# Altium PCB Mixed Signal Board Project.PcbDoc (part 2 of 2)
Units mm, origin at the board's own origin, x right, y up, seen from the top; angles counter-clockwise.
Board outline 70.1 x 70.99 mm, 4 copper layers (Top Layer, GND, VCC, Bottom Layer), stack 1.565 mm thick; 188 components, 144 nets, 738 pads, 167 vias.
Unrouted connection lines stored in the file: 495.
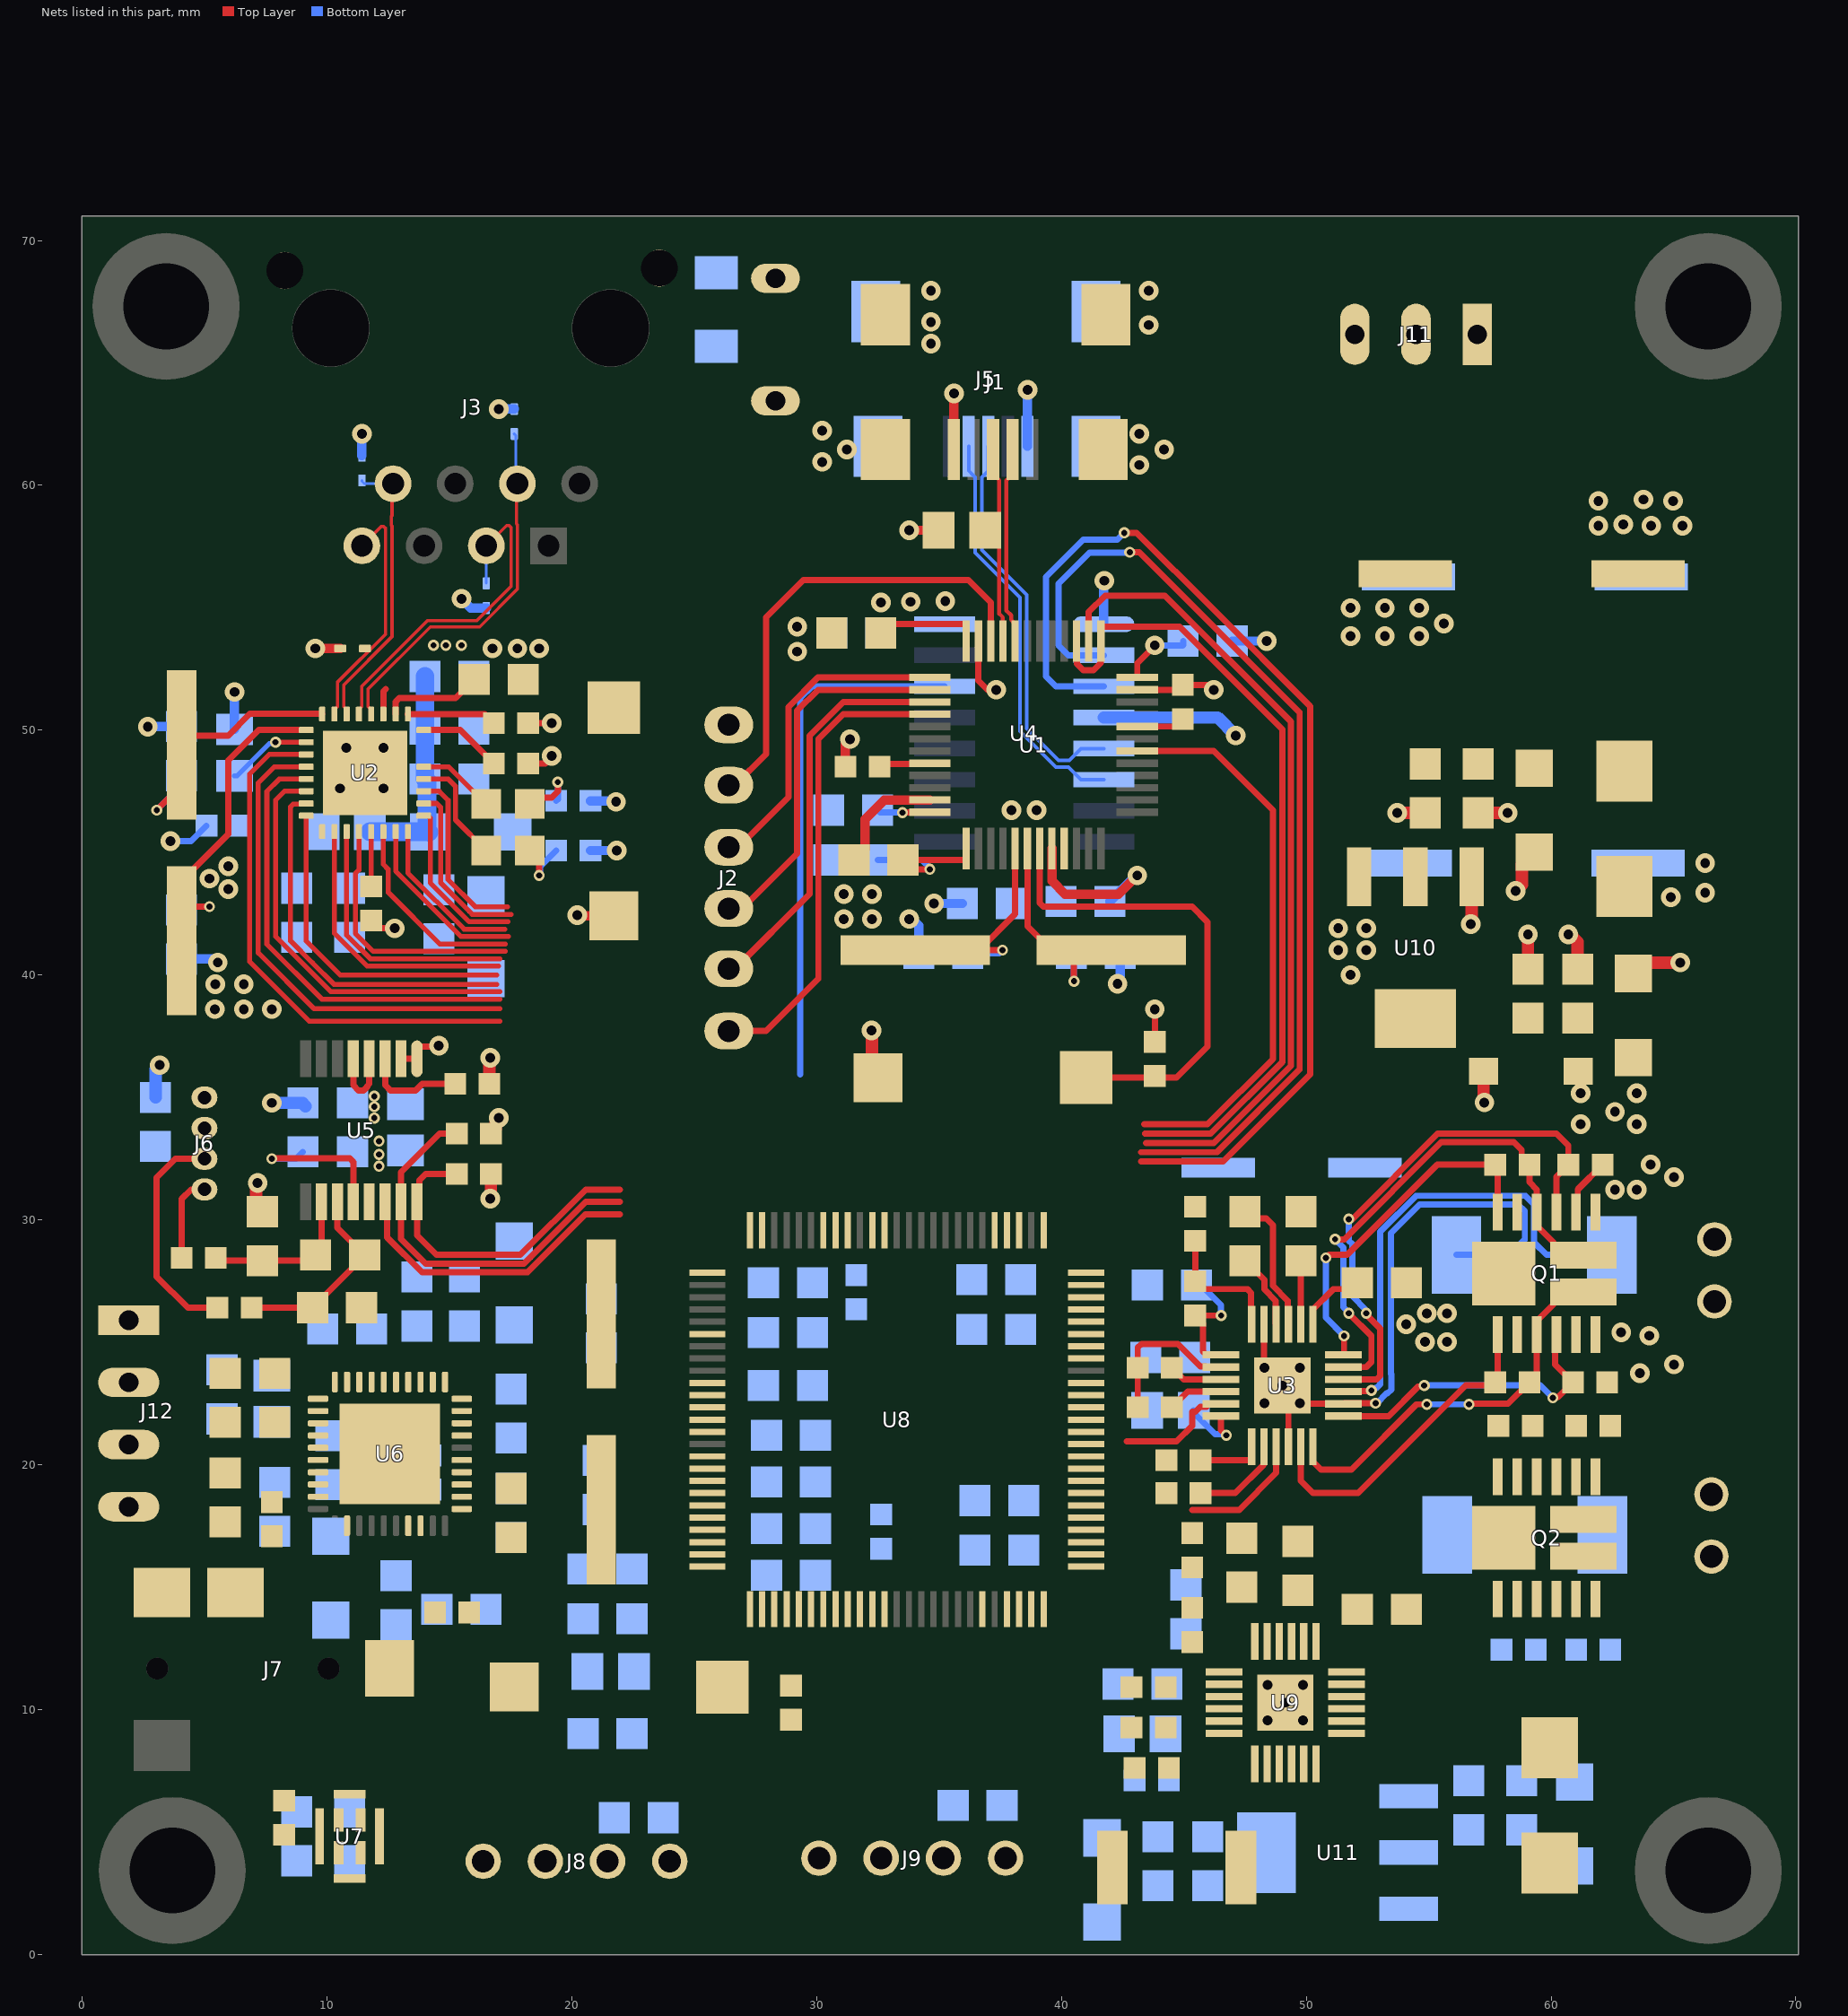
[diagram p4: the nets of this part, all layers, seen from the top]

## Part data (continued)
U8: library part IC_STM32F407VGT6, "ARM® Cortex®-M4 STM32F4 Microcontroller IC 32-Bit 168MHz 1MB (1M x 8) FLASH 100-LQFP (14x14)", Alternate Part Number-1=STM32F407VET6, Case/Package=LQFP100, Manufacturer=STMicroelectronics, Manufacturer Part Number=STM32F407VGT6, Supplier Part Number-1=STM32F407VGT6, Supplier-1=ARROW
U10: library part REG_15V-3.3V-0.9A-12W-SOT223, "Linear Voltage Regulator IC 1 Output 800mA SOT-223", Alternate Part Number-1=NA, Case/Package=SOT223, Manufacturer=STMicroelectronics, Manufacturer Part Number=LD1117S33CTR, Supplier Part Number-1=LD1117S33CTR, Supplier-1="SP ROAD"
U11: library part REG_15V-1.8V-0.8A-1.4W-SOT223, "LDO Voltage Regulators 1.8V 0.8A Positive", Alternate Part Number-1=NA, Case/Package=SOT-223-3, Manufacturer=STMicroelectronics, Supplier Part Number-1=511-LD1117S18-TR, Manufacturer Part Number=LD1117S18TR, Supplier-1=Mouser
X1 X2: library part XTAL_8MHZ-ECS-80-32-5PX-SMD, "8MHz ±30ppm Crystal 32pF 60 Ohms HC-49/US", Alternate Part Number-1=NA, Case/Package=SMD/SMT, Manufacturer="Fox Electronics", Manufacturer Part Number=ECS-80-32-5PX-TR, Supplier Part Number-1=ECS-80-32-5PX-TR, Supplier-1="SP ROAD"
Y1: library part XTAL_25Mhz-FOXSDLF/250F-20, "25MHz ±30ppm Crystal 20pF 30 Ohms HC-49/US", Alternate Part Number-1=NA, Case/Package=SMD, Manufacturer=Abracon, Manufacturer Part Number=FOXSDLF/250F-20, Supplier Part Number-1=FOXSDLF/250F-20, Supplier-1=MOUSER

## Via types
v1: diameter 0.8, hole 0.4, Top Layer to Bottom Layer, 132 vias
v2: diameter 0.45, hole 0.25, Top Layer to Bottom Layer, 35 vias

## Nets (pads, with @x,y where several pads share a name; then routed paths per layer and width w, separated by ;. In a path a pad name is that pad's centre, name@x,y a point inside that pad or via, vN(x,y) a via of type N, cw(c..) or ccw(c..) an arc to the next point about the centre after c; other vN are vias at no path point)
+1V8: C37.2 C38.2 C87.2 C88.2 C89.2 D8.K FB3.1 U6.34 U11.2 U11.4
+3V3: C1.2 C2.2 C3.2 C4.2 C7.2 C8.2 C9.2 C16.2 C17.2 C18.2 C19.2 C28.2 C29.2 C31.2 C44.2 C45.2 C46.2 C47.2 C52.2 C53.2 C54.2 C55.2 C59.2 C60.2 C61.2 C62.2 C63.2 C64.2 C71.2 C78.2 C79.2 C83.2 D6.K FB1.1 FB2.1 FB4.1 J6.3 J8.3 J9.3 R2.2 R3.2 R5.2 R8.2 R9.2 R10.1 R21.1 R25.2 R26.2 R27.2 R32.2 R33.2 R35.2 R45.1 U1.1 U1.9 U1.24 U1.36 U1.48 U2.17 U4.4 U4.16 U5.13 U6.5 U6.8 U6.33 U7.1 U8.6 U8.11 U8.19 U8.28 U8.50 U8.75 U8.100 U10.2 U10.4 | length 34.9
  Top Layer w0.254: R8.2@11.811,42.227 12.128,41.91 v1(12.774,41.91) v1@12.807,41.877 ; R5.2@18.218,48.641 18.923,48.641 19.177,48.895 v1@19.177,49.022 ; R9.2@18.218,50.292 v1(19.177,50.292) ; C4.2@32.623,53.975 32.989,54.341 36.089,54.341 36.112,54.318 U1.36@36.112,53.641 ; v2(33.506,46.637) 33.514,46.645 34.616,46.645 U1.48@34.624,46.653 ; v2(34.624,44.323) 33.909,44.323 C3.2@33.528,44.704 36.089,44.704 36.112,44.727 U1.1@36.112,45.165 ; U1.24@43.1,52.153 43.1,52.752 v1(43.815,53.467) ; R2.2@43.815,37.275 v1(43.815,38.608)
  Top Layer w0.381: v1(33.782,58.166) R3.2@34.991,58.166
  Top Layer w0.508: R27.2@16.637,35.56 16.637,36.52 v1@16.701,36.584 ; v1@16.701,30.832 R25.2@16.701,31.877 ; R26.2@16.701,33.528 16.891,33.718 16.891,33.957 17.018,34.084 v1(17.018,34.163)
  Bottom Layer w0.254: v1(3.612,45.466) 4.445,45.466 R10.1@5.08,46.101 ; C2.2@32.496,44.704 34.29,44.704 34.624,44.37 v2(34.624,44.323) ; C1.2@32.496,46.736 32.594,46.637 v2(33.506,46.637) ; C28.2@32.623,53.975 32.979,54.331 U4.16@35.231,54.331 ; v1(43.815,53.467) 44.958,53.467 44.974,53.483 C9.2@44.974,53.641
  Bottom Layer w0.508: U4.4@41.731,50.521 46.38,50.521 v1(47.117,49.784)
  other v1: 16.668,30.865 61.214,33.909 63.5,33.909 62.611,34.417 61.214,35.179 63.5,35.179 16.668,36.617 5.969,43.511 5.207,43.942 5.969,44.45 37.957,46.736 38.989,46.736 19.177,48.959 32.623,55.217 33.846,55.245 35.259,55.275
  other v2: 12.128,32.194 12.128,32.676 12.128,33.22
+12V: C23.2 C24.1 C25.2 C73.2 C75.2 C80.1 C81.1 C82.1 D5.A D7.A J11.1 Q1.2 Q1.11 Q1.15 Q2.2 Q2.11 Q2.15 U3.1 U9.1 | length 2.9
  Top Layer w0.254: U3.1@50.272,25.741 50.272,26.341 51.109,27.178 51.832,27.178 C25.2@52.086,27.432
  other v1: 54.856,25.019 55.753,25.019 54.086,25.741 54.927,26.187 55.753,26.187 64.897,43.18 66.294,43.37 66.294,44.577 61.933,58.349 64.092,58.349 65.362,58.349 62.949,58.405 61.933,59.365 64.981,59.365 63.775,59.421
AIN0: J6.2 R28.2 | length 9.3
  Top Layer w0.254: J6.2@5,32.5 3.81,32.5 3.048,31.738 3.048,27.686 4.318,26.416 R28.2@5.524,26.416
AIN1: J6.1 R29.2 | length 3.5
  Top Layer w0.254: R29.2@4.064,28.448 4.064,30.861 4.445,31.242 4.992,31.242 J6.1@5,31.25
CAN_RX: J9.1 U8.70
CAN_TX: J9.2 U8.71
CH340_RST: U4.14 U8.57 | length 21.5
  Bottom Layer w0.254: 29.337,35.941 29.337,51.308 29.82,51.791 U4.14@35.231,51.791
CH340_RXD: U4.3 U8.79 | length 44.5
  Top Layer w0.254: v2(42.569,58.063) 43.079,58.063 46.179,54.962 50.165,50.976 50.165,35.941 46.609,32.385 43.252,32.385
  Bottom Layer w0.254: U4.3@41.731,51.791 39.773,51.791 39.37,52.194 39.37,56.261 40.894,57.785 42.291,57.785 v2@42.545,58.039
CH340_TXDPort: U4.2 U8.78 | length 40.1
  Top Layer w0.254: v2(42.791,57.269) 43.188,57.269 49.73,50.727 49.73,36.141 46.355,32.766 43.252,32.766
  Bottom Layer w0.254: U4.2@41.731,53.061 40.284,53.061 39.886,53.46 39.886,55.983 41.148,57.246 42.768,57.246 v2(42.791,57.269) v2@42.799,57.277
CH340USB_D_N: J5.2 U4.6 | length 16.7
  Bottom Layer w0.146: J5.2@36.212,61.595 36.212,60.595 J5.2@36.389,60.418 ; J5.2@36.39,60.418 36.476,60.332 36.476,57.246 38.305,55.416 38.305,49.963 39.773,48.495 40.284,48.495 40.799,47.981 U4.6@41.731,47.981
CH340USB_D_P: J5.3 U4.5 | length 16.3
  Bottom Layer w0.146: J5.3@36.834,60.418 36.748,60.332 36.748,57.359 38.578,55.529 38.578,50.076 39.886,48.768 40.315,48.768 40.799,49.251 U4.5@41.731,49.251 ; J5.3@36.835,60.418 37.012,60.595 J5.3@37.012,61.595
CLK_MIC: U7.3 U8.65
COL: DS1.A U2.28 U8.26 | length 4.6
  Top Layer w0.203: U2.28@13.957,48.01 14.952,48.01 15.253,47.709 15.253,46.342 DS1.A@16.51,45.085
CRS: DS2.A U2.29 U8.23 | length 3.2
  Top Layer w0.203: U2.29@13.957,48.51 14.97,48.51 15.991,47.488 16.012,47.488 DS2.A@16.51,46.99
DOUT_MIC: U7.4 U8.53
DRDY: U5.14 U8.56 | length 12.6
  Top Layer w0.254: U5.14@12.379,30.734 12.46,30.653 12.46,29.286 13.879,27.867 18.2,27.867 20.559,30.226 21.971,30.226
DVDD: C27.2 R23.2 R24.2 R46.2 R47.2 U3.8 | length 6.3
  Top Layer w0.254: R23.2@43.116,22.352 R24.2@43.116,23.966 43.116,24.791 43.265,24.94 44.749,24.94 45.675,24.014 45.899,24.014 45.922,23.991 U3.8@46.522,23.991
DVDD_2: C77.2 U9.8
EARTH: C21.1 J11.2 R12.1
EN: R22.2 U3.14 U8.45 | length 3.8
  Top Layer w0.254: R22.2@45.687,18.844 47.096,18.844 48.249,19.997 48.249,20.714 U3.14@48.272,20.737
EN_2: R48.2 U8.66 U9.14
EXT_UART_RX: J8.1 U8.69
EXT_UART_TX: J8.2 U8.68
GH1: Q1.1 R15.1 U3.17 | length 13.4
  Top Layer w0.254: U3.17@49.772,20.737 49.772,19.344 50.272,18.844 52.118,18.844 56.515,23.241 57.595,23.241 57.817,23.463 Q1.1@57.817,25.313
GH1_2: Q2.1 R39.1 U9.17
GH2: Q1.12 R16.2 U3.24 | length 14.8
  Top Layer w0.254: v2(50.8,28.448) 50.927,28.575 51.673,28.575 55.356,32.258 R16.2@57.721,32.258 57.817,32.162 Q1.12@57.817,30.313 ; U3.24@51.522,24.491 51.545,24.514 v2(51.545,25.263)
  Bottom Layer w0.254: v2(50.8,28.448) 50.8,26.008 v2(51.545,25.263)
GH2_2: Q2.12 R40.2 U9.24
GL1: Q1.4 R17.1 U3.19 | length 12.6
  Top Layer w0.254: U3.19@51.522,21.991 53.36,21.991 54.572,23.203 54.783,23.203 v2(54.821,23.241) ; v2(60.071,22.733) 60.109,22.771 60.299,22.771 R17.1@60.897,23.368 60.166,24.098 60.166,25.262 Q1.4@60.217,25.313
  Bottom Layer w0.254: v2(54.821,23.241) 59.563,23.241 v2(60.071,22.733)
GL1_2: Q2.4 R41.1 U9.19
GL2: Q1.9 R18.1 U3.22 | length 22
  Top Layer w0.254: U3.22@51.522,23.491 52.87,23.491 53.019,23.64 53.019,25.566 52.451,26.134 v2(52.451,26.187) ; v2(51.737,30.032) 51.876,30.032 55.372,33.528 60.217,33.528 60.706,33.039 R18.1@60.706,32.258 60.389,31.941 60.217,31.769 Q1.9@60.217,30.313
  Bottom Layer w0.254: v2(51.737,30.032) 51.737,29.154 51.876,29.016 51.876,26.889 52.451,26.314 v2(52.451,26.187)
GL2_2: Q2.9 R42.1 U9.22
GND: C1.1 C2.1 C3.1 C4.1 C5.1 C6.1 C7.1 C8.1 C9.1 C10.1 C11.1 C12.1 C13.1 C14.1 C15.1 C16.1 C17.1 C18.1 C19.1 C20.1 C24.2 C25.1 C26.1 C27.1 C28.1 C29.1 C30.1 C31.1 C33.1 C34.1 C35.2 C36.1 C37.1 C38.1 C39.2 C40.1 C41.1 C43.1 C44.1 C45.1 C46.1 C47.1 C48.2 C49.2 C50.2 C51.2 C52.1 C53.1 C54.1 C55.1 C56.2 C57.1 C58.2 C59.1 C60.1 C61.1 C62.1 C63.1 C64.1 C65.1 C66.1 C67.1 C68.1 C69.1 C70.1 C71.1 C75.1 C76.1 C77.1 C78.1 C79.1 C80.2 C81.2 C82.2 C83.1 C84.1 C85.1 C86.1 C87.1 C88.1 C89.1 C90.1 C91.1 C92.1 D1.A D2.A D3.A D4.A D6.A D8.A J1.5 J1.6 J2.6 J5.5 J5.6 J6.4 J7.1 J8.4 J9.4 J11.3 R1.1 R4.1 R6.1 R7.1 R11.1 R14.1 R19.1 R20.1 R22.1 R34.1 R36.2 R38.1 R43.1 R44.1 R48.1 SW1.1 SW2.1 SW3.1 U1.8 U1.23 U1.35 U1.47 U2.33 U3.5 U3.16 U3.20 U3.25 U4.1 U5.1 U5.2 U5.4 U5.5 U6.3 U6.17 U6.22 U6.31 U6.35 U6.41 U7.5 U8.10 U8.20 U8.27 U8.74 U8.99 U9.5 U9.16 U9.20 U9.25 U10.1 U11.1 | length 93
  Top Layer w0.254: U5.5@11.079,36.584 11.079,35.5 11.286,35.293 11.497,35.293 11.646,35.441 11.646,35.477 11.729,35.56 U5.4@11.729,36.584 ; U5.2@13.029,36.584 U5.1@13.679,36.584 13.679,36.993 13.77,37.084 v1@14.605,37.084 ; U1.35@36.612,53.641 36.612,52.034 36.993,51.653 v1(37.338,51.653) ; U1.23@43.1,51.653 44.76,51.653 R4.1@44.958,51.851 46.075,51.851 46.224,51.703 v1(46.224,51.653) ; U3.5@48.272,25.741 48.272,23.991 v1(48.297,23.966) v1(49.022,23.241) U3.25@49.272,22.991 ; U3.16@49.272,20.737 U3.25@49.272,22.991 ; v2(52.832,22.516) 51.547,22.516 U3.20@51.522,22.491 49.772,22.491 v1(49.747,22.516) U3.25@49.272,22.991
  Top Layer w0.381: v1(9.525,53.34) D1.A@10.544,53.34 ; v1@20.193,42.484 20.259,42.418 SW2.1@21.717,42.418 ; R1.1@31.179,48.514 31.179,49.447 v1(31.369,49.637) ; C3.1@31.528,44.704 31.973,45.148 31.973,46.368 32.758,47.153 U1.47@34.624,47.153 ; J1.5@35.611,61.468 v1(35.611,63.754) ; U1.8@39.612,45.165 39.612,43.845 40.15,43.307 42.338,43.307 v1(43.1,44.069)
  Top Layer w0.508: v1@7.112,31.496 7.112,30.591 C33.1@7.366,30.337 ; v1@32.258,37.719 32.258,36.068 SW1.1@32.512,35.814 ; v1(53.721,46.625) C86.1@54.864,46.625 ; U10.1@56.758,44.023 56.758,42.048 v1@56.769,42.037 ; C85.1@57.023,46.625 v1(58.229,46.625) ; D6.A@57.245,36.074 57.245,34.989 57.277,34.957 v1@57.277,34.925 ; v1(58.547,43.434) 58.806,43.693 58.806,44.514 C84.1@59.314,45.022 ; C78.1@59.055,40.243 v1(59.055,41.656) ; v1(60.706,41.656) 60.789,41.656 61.087,41.358 C79.1@61.087,40.243 ; C83.1@63.368,40.068 63.813,40.513 v1@65.151,40.513
  Bottom Layer w0.254: C14.1@15.875,52.324 16.002,52.197 C14.1@16.008,52.197 ; v2(52.832,22.516) 52.885,22.516 53.282,22.913 53.311,22.913 53.471,23.073 53.471,23.7 53.459,23.713 53.459,29.463 54.229,30.233 54.63,30.634 58.647,30.634 58.928,30.353 58.928,29.21 58.293,28.575 R19.1@56.134,28.575
  Bottom Layer w0.381: v1@2.667,50.165 v1(2.683,50.149) C15.1@4.064,50.149 ; C20.1@4.064,40.656 5.395,40.656 v1@5.538,40.513 ; R11.1@6.223,50.033 v1(6.223,51.562) ; D2.A@11.43,61.211 v1(11.43,62.103) ; v1(15.494,55.372) 15.875,54.991 D3.A@16.51,54.991 ; v1(17.018,63.119) 17.647,63.119 D4.A@17.653,63.113 ; R6.1@20.764,45.085 v1(21.844,45.085) ; R7.1@20.764,47.117 v1@21.844,47.117 ; v1(33.782,42.291) 33.909,42.291 34.179,42.021 C5.1@34.179,40.894 ; v1(34.798,42.926) C7.1@35.957,42.926 ; v1@38.608,63.881 38.612,63.877 J5.5@38.612,61.595 ; U4.1@41.731,54.331 41.731,56.082 v1@41.783,56.134 ; C8.1@41.985,43.006 43.048,44.069 v1(43.1,44.069) ; v1@42.291,39.624 42.402,39.735 C6.1@42.402,40.894 ; C9.1@46.974,53.641 v1(48.387,53.641)
  Bottom Layer w0.508: C31.1@3,35 3,36.147 v1(3.175,36.322) ; v1(7.747,34.782) 8.988,34.782 C30.1@9.017,34.753 ; C30.1@9.017,34.782 C30.1@9.017,34.753 ; C30.1@9.129,34.641 C30.1@9.017,34.753
  other v1: 48.424,9.562 49.874,9.562 49.149,10.287 48.424,11.012 49.874,11.012 48.297,22.516 49.747,23.966 7.17,31.514 57.277,34.798 14.572,37.117 32.242,37.743 5.425,38.608 6.604,38.608 7.747,38.608 5.441,39.624 6.604,39.624 42.294,39.649 51.816,40.005 5.541,40.515 65.278,40.513 51.308,41.021 52.451,41.021 51.308,41.91 52.451,41.91 56.718,42.083 31.115,42.291 32.258,42.291 20.226,42.451 31.115,43.307 32.258,43.307 21.81,47.076 10.541,47.625 12.307,47.625 10.795,49.276 12.319,49.276 29.21,53.213 16.764,53.34 17.78,53.34 18.667,53.34 51.816,53.848 53.213,53.848 54.61,53.848 29.21,54.229 55.626,54.356 51.816,54.991 53.213,54.991 54.61,54.991 41.757,56.108 43.18,60.833 30.226,60.96 31.242,61.468 44.196,61.468 43.18,62.103 30.226,62.23 38.623,63.905 34.671,65.786 43.561,66.548 34.671,66.675 34.671,67.945 43.561,67.945
  other v2: 11.938,34.163 11.938,34.629 11.938,35.052
INT: R8.1 U2.21 | length 2.2
  Top Layer w0.203: U2.21@11.807,45.86 11.807,43.628 R8.1@11.811,43.624
JTCK/SWCLK_F103: J2.4 U1.37 | length 13.2
  Top Layer w0.254: J2.4@26.416,45.219 26.804,45.219 28.856,47.271 28.856,50.954 30.055,52.153 U1.37@34.624,52.153
JTCLK_F407: U1.18 U8.76 | length 23.1
  Top Layer w0.254: U1.18@43.1,49.153 46.224,49.153 48.641,46.736 48.641,36.576 45.974,33.909 43.39,33.909
JTDI_F103: J2.3 U1.38 | length 15.3
  Top Layer w0.254: J2.3@26.416,42.719 26.971,42.719 29.21,44.958 29.21,50.8 30.063,51.653 U1.38@34.624,51.653
JTDO_F103: J2.2 U1.39 | length 16.5
  Top Layer w0.254: J2.2@26.416,40.259 26.666,40.259 29.718,43.311 29.718,49.784 31.087,51.153 U1.39@34.624,51.153
JTMS/SWDIO_F103: J2.5 U1.34 | length 19.4
  Top Layer w0.254: J2.5@26.416,47.759 26.666,47.759 27.94,49.033 27.94,54.61 29.464,56.134 36.195,56.134 37.112,55.217 U1.34@37.112,53.641
JTMS_F407: U1.25 U1.27 U8.72 | length 33.2
  Top Layer w0.254: U1.27@40.612,53.641 40.635,53.618 40.635,52.71 40.894,52.451 41.311,52.451 41.612,52.752 U1.25@41.612,53.641 41.612,54.206 41.635,54.229 44.831,54.229 49.022,50.038 49.022,36.449 46.101,33.528 43.411,33.528
LRCK: U6.40 U8.90
MCLK: U6.37 U8.29
MDC: U2.12 U8.16 | length 20
  Top Layer w0.203: U2.12@9.157,48.51 7.853,48.51 7.194,47.852 7.194,40.91 9.48,38.624 17.064,38.624
MDIO: R10.2 U2.11 U8.25 | length 21.5
  Top Layer w0.203: U2.11@9.157,49.01 7.646,49.01 6.841,48.205 6.841,40.556 9.273,38.124 17.064,38.124
NetC5_2: C5.2 U1.5 X1.2 | length 9.8
  Top Layer w0.254: X1.2@34.037,41.021 X1.2@36.639,41.021 ; v2(37.592,41.021) X1.2@36.639,41.021 ; U1.5@38.112,45.165 38.112,42.494 X1.2@36.639,41.021
  Bottom Layer w0.254: C5.2@36.179,40.894 37.465,40.894 v2(37.592,41.021)
NetC6_2: C6.2 U1.6 X1.1 | length 8.1
  Top Layer w0.254: U1.6@38.612,45.165 38.612,41.998 39.589,41.021 40.513,41.021 40.612,41.021 40.513,40.922 v2(40.513,39.751)
  Bottom Layer w0.254: C6.2@40.402,40.894 40.513,40.783 v2(40.513,39.751)
NetC10_2: C10.2 U2.2 | length 4.1
  Top Layer w0.254: U2.2@12.807,50.66 12.807,51.159 12.956,51.308 15.253,51.308 C10.2@16.015,52.07
NetC11_2: C11.2 C12.2 C13.2 C14.2 FB1.2 U2.3 | length 9.8
  Top Layer w0.254: U2.3@12.307,50.66 12.307,51.592 12.401,51.687
  Bottom Layer w0.762: FB1.2@11.757,45.86 11.766,45.851 14.017,45.851 C11.2@14.084,45.918 ; C14.2@14.008,52.197 C13.2@14.008,50.038 C12.2@14.008,48.006 14.084,47.93 C11.2@14.084,45.918 ; C11.2@14.16,45.842 C11.2@14.084,45.918
  other v2: 14.351,53.467 14.859,53.467 15.494,53.467
NetC15_2: C15.2 U2.8 Y1.2 | length 11.2
  Top Layer w0.254: v2(3.048,46.736) 4.064,47.752 Y1.2@4.064,49.403 4.445,49.784 5.969,49.784 6.858,50.673 9.805,50.673 9.807,50.671 U2.8@9.807,50.66
  Bottom Layer w0.254: v2(3.048,46.736) 3.612,47.3 3.612,47.697 C15.2@4.064,48.149
NetC20_2: C20.2 U2.9 Y1.1 | length 14.4
  Top Layer w0.254: Y1.1@4.064,41.403 Y1.1@4.064,42.326 ; v2(5.207,42.799) 4.537,42.799 Y1.1@4.064,42.326 ; U2.9@9.157,50.01 7.211,50.01 5.969,48.768 5.969,45.756 4.064,43.851 Y1.1@4.064,42.326
  Bottom Layer w0.254: C20.2@4.064,42.656 4.207,42.799 v2(5.207,42.799)
NetC21_2: C21.2 J3.9 J3.10 R12.2
NetC22_1: C22.1 U3.3 | length 5.7
  Top Layer w0.254: C22.1@47.498,30.337 47.774,30.061 48.365,30.061 48.641,29.786 48.641,27.309 49.249,26.701 49.249,25.764 U3.3@49.272,25.741
NetC22_2: C22.2 U3.4 | length 3.1
  Top Layer w0.254: C22.2@47.498,28.337 48.287,27.548 48.287,27.162 48.749,26.7 48.749,25.764 U3.4@48.772,25.741
NetC23_1: C23.1 U3.2 | length 2.6
  Top Layer w0.254: U3.2@49.772,25.741 49.784,25.753 C23.1@49.784,28.337
NetC26_2: C26.2 R13.2 U3.7 | length 5.7
  Top Layer w0.254: U3.7@46.522,24.491 45.922,24.491 45.783,24.629 45.783,25.781 R13.2@45.466,26.098 v2(46.522,26.098)
  Bottom Layer w0.254: C26.2@45.514,27.344 45.514,27.612 45.529,27.628 45.529,27.519 46.522,26.526 v2(46.522,26.098)
NetC30_2: C30.2 FB2.2 U5.12 | length 6.4
  Top Layer w0.254: v2(7.747,32.5) 7.759,32.512 10.93,32.512 11.079,32.363 U5.12@11.079,30.734
  Bottom Layer w0.254: v2(7.747,32.5) 8.735,32.5 C30.2@9.017,32.782
NetC32_1: C32.1 C33.2 R29.1 U5.10 | length 6.5
  Top Layer w0.254: R29.1@5.461,28.448 5.572,28.337 C33.2@7.366,28.337 9.414,28.337 9.541,28.464 C32.1@9.541,28.575 9.779,28.813 U5.10@9.779,30.734
NetC32_2: C32.2 C34.2 R28.1 U5.11 | length 8.2
  Top Layer w0.254: R28.1@6.921,26.416 9.144,26.416 C34.2@9.414,26.416 11.033,28.035 11.033,28.067 C32.2@11.541,28.575 10.429,29.687 U5.11@10.429,30.734
NetC35_1: C35.1 R31.2
NetC36_2: C36.2 C40.2 C41.2 FB3.2 U6.13 U6.16
NetC39_1: C39.1 R30.2
NetC42_1: C42.1 U6.11
NetC42_2: C42.2 U6.12
NetC43_2: C43.2 U6.10
NetC48_1: C48.1 U6.27
NetC49_1: C49.1 U6.28
NetC50_1: C50.1 U6.18
NetC51_1: C51.1 U6.19
NetC56_1: C56.1 U8.12 X2.2
NetC58_1: C58.1 U8.13 X2.1
NetC65_2: C65.2 U8.73
NetC66_2: C66.2 U8.49
NetC67_2: C67.2 C68.2 C69.2 C70.2 FB4.2 U8.21 U8.22
NetC72_1: C72.1 U9.3
NetC72_2: C72.2 U9.4
NetC73_1: C73.1 U9.2
NetC76_2: C76.2 R37.2 U9.7
NetC84_2: C84.2 C85.2 C86.2 D5.K U10.3
NetC90_2: C90.2 C91.2 C92.2 D7.K U11.3
NetDS1_K: DS1.K R6.2 | length 2.5
  Top Layer w0.254: DS1.K@18.288,45.085 18.669,44.704 v2(18.669,44.069)
  Bottom Layer w0.254: v2(18.669,44.069) 18.707,44.107 18.707,44.424 R6.2@19.367,45.085
NetDS2_K: DS2.K R7.2 | length 2.5
  Top Layer w0.254: DS2.K@18.288,46.99 18.542,47.244 19.177,47.244 19.431,47.498 v2(19.431,47.879)
  Bottom Layer w0.254: R7.2@19.367,47.117 19.431,47.181 v2(19.431,47.879)
NetJ7_2: J7.2 R30.1 U6.14
NetJ7_3: J7.3 R31.1 U6.15
NetQ2_7: Q2.7 R43.2
NetR1_2: R1.2 U1.44 | length 2.1
  Top Layer w0.254: R1.2@32.576,48.514 32.681,48.619 33.506,48.619 33.517,48.63 34.601,48.63 U1.44@34.624,48.653
NetR4_2: R4.2 U1.20 | length 2
  Top Layer w0.254: U1.20@43.1,50.153 44.657,50.153 R4.2@44.958,50.454
NetR9_1: R9.1 U2.1 | length 3.7
  Top Layer w0.254: U2.1@13.307,50.66 16.453,50.66 R9.1@16.821,50.292
NetR11_2: R11.2 U2.10 | length 3.5
  Top Layer w0.203: v2(7.901,49.51) U2.10@9.157,49.51
  Bottom Layer w0.203: R11.2@6.223,48.133 6.323,48.133 7.653,49.463 7.854,49.463 v2(7.901,49.51)
NetR13_1: R13.1 R14.2 U3.6 | length 5.4
  Top Layer w0.254: R14.2@45.466,29.146 R13.1@45.466,27.495 45.783,27.178 47.6,27.178 47.749,27.029 47.749,25.764 U3.6@47.772,25.741
NetR20_2: R20.2 U3.12 | length 2.7
  Top Layer w0.254: U3.12@46.522,21.991 46.522,21.423 v2(46.736,21.209)
  Bottom Layer w0.254: R20.2@45.4,22.225 45.4,22.125 46.278,21.247 46.698,21.247 v2(46.736,21.209)
NetR21_2: R21.2 U3.13 | length 2.6
  Top Layer w0.254: R21.2@45.687,20.193 47.749,20.193 47.772,20.216 U3.13@47.772,20.741
NetR33_1: R33.1 U7.2
NetR34_2: R34.2 U8.37
NetR36_1: R36.1 U8.94
NetR37_1: R37.1 R38.2 U9.6
NetR44_2: R44.2 U9.12
NetR45_2: R45.2 U9.13
nFAULT: R24.1 U3.9 U8.62 | length 2.2
  Top Layer w0.254: R24.1@44.513,23.966 44.988,23.491 U3.9@46.522,23.491
nFAULT_2: R47.1 U8.59 U9.9
NRST: R2.1 SW1.2 U1.7 | length 20
  Top Layer w0.254: U1.7@39.112,45.165 39.112,42.948 39.261,42.799 45.339,42.799 45.974,42.164 45.974,37.084 44.704,35.814 43.815,35.814 SW1.2@41.012,35.814
NTJRST_F103: J2.1 U1.40 | length 19.3
  Top Layer w0.254: J2.1@26.416,37.719 27.94,37.719 30.072,39.851 30.072,49.637 31.088,50.653 U1.40@34.624,50.653
NTRST_F407: C57.2 R35.1 SW3.2 U1.26 U8.14 | length 33.1
  Top Layer w0.254: U1.26@41.112,53.641 41.112,54.828 41.783,55.499 44.231,55.499 49.376,50.354 49.376,36.295 46.228,33.147 43.453,33.147
OUTA+: J12.1 U6.4
OUTA-: J12.2 U6.6
OUTB+: J12.3 U6.7
OUTB-: J12.4 U6.9
PH: U3.15 U8.63 | length 5.1
  Top Layer w0.254: 45.339,18.161 47.264,18.161 48.772,19.669 U3.15@48.772,20.737
PH_2: U8.60 U9.15
PHY_RESET: R5.1 SW2.2 U2.32 U8.64 | length 3.4
  Top Layer w0.254: U2.32@13.957,50.01 15.452,50.01 R5.1@16.821,48.641
RD_N: D4.K J3.6 U2.4 | length 15.3
  Top Layer w0.132: U2.4@11.807,50.66 11.807,50.835 11.686,50.956 11.686,51.687 14.224,54.224 16.236,54.224 17.78,55.768 17.78,58.387 17.74,58.427 17.74,60.031 J3.6@17.78,60.071
  Bottom Layer w0.114: D4.K@17.653,62.103 17.716,62.039 17.716,60.134 J3.6@17.78,60.071
RD_P: D3.K J3.5 U2.5 | length 14.3
  Top Layer w0.132: U2.5@11.307,50.66 11.307,50.835 11.428,50.956 11.428,51.794 14.117,54.483 16.129,54.483 17.521,55.875 17.521,58.279 17.444,58.357 17.336,58.357 J3.5@16.51,57.531
  Bottom Layer w0.114: D3.K@16.51,56.001 J3.5@16.51,57.531
RESET: R27.1 U5.3 U8.55 | length 4.1
  Top Layer w0.254: U5.3@12.379,36.584 12.379,35.5 12.595,35.284 13.621,35.284 13.897,35.56 R27.1@15.24,35.56
RESET_DAC: R32.1 U6.32 U8.54
RX_CLK: U2.19 U8.24 | length 10.9
  Top Layer w0.203: U2.19@10.807,45.86 10.807,41.629 11.771,40.664 17.064,40.664
RX_D0: U2.16 U8.33 | length 13.5
  Top Layer w0.203: U2.16@9.157,46.51 9.157,41.389 10.541,40.005 16.936,40.005
RX_D1: U2.15 U8.34 | length 15.3
  Top Layer w0.203: U2.15@9.157,47.01 9.137,46.99 8.628,46.99 8.509,46.871 8.509,41.402 9.398,40.513 10.287,39.624 16.936,39.624
RX_D2: U2.14 U8.35 | length 17.1
  Top Layer w0.203: U2.14@9.157,47.51 8.267,47.51 7.901,47.144 7.901,41.581 10.161,39.321 17.064,39.321
RX_D3: U2.13 U8.36 | length 18.5
  Top Layer w0.203: U2.13@9.157,48.01 8.06,48.01 7.548,47.498 7.548,41.263 9.793,39.018 17.064,39.018
RX_DV: U2.18 U8.32 | length 11.4
  Top Layer w0.203: U2.18@10.307,45.86 10.307,41.7 11.646,40.361 17.009,40.361
RX_ER: U2.20 U8.47 | length 10.6
  Top Layer w0.203: U2.20@11.307,45.86 11.307,44.295 11.165,44.152 11.165,41.699 11.897,40.968 17.279,40.968
SCL: R25.1 U5.16 U6.2 U8.92 | length 13.6
  Top Layer w0.254: R25.1@15.304,31.877 14.033,31.877 13.777,31.621 13.777,30.832 U5.16@13.679,30.734 13.679,29.374 14.478,28.575 17.907,28.575 20.574,31.242 21.971,31.242
SCLK: U6.38 U8.89
SDA: R26.1 U5.15 U6.1 U8.93 | length 16.1
  Top Layer w0.254: R26.1@15.304,33.528 14.605,33.528 13.029,31.952 U5.15@13.029,30.734 13.029,29.225 14.033,28.221 18.054,28.221 20.567,30.734 21.971,30.734
SDIN: U6.39 U8.80
SH1: J4.1 Q1.3 Q1.13 R15.2 U3.18 | length 16.1
  Top Layer w0.254: U3.18@50.272,20.737 50.272,20.137 50.597,19.812 51.848,19.812 54.506,22.47 v2(54.927,22.47) ; v2(56.647,22.47) 56.668,22.491 58.242,22.491 R15.2@59.119,23.368 59.417,23.666 Q1.3@59.417,25.313 59.417,25.863 60.094,26.54 60.094,26.64 60.517,27.063 Q1.13@61.317,27.063
  Bottom Layer w0.254: v2(54.927,22.47) v2(56.647,22.47)
SH1_2: J10.1 Q2.3 Q2.13 R39.2 U9.18
SH2: J4.2 Q1.10 Q1.14 R16.1 U3.23 | length 22
  Top Layer w0.254: v2(51.181,29.21) 51.555,29.21 55.519,33.174 58.475,33.174 58.801,32.848 58.801,32.575 R16.1@59.118,32.258 59.118,31.541 59.417,31.242 Q1.10@59.417,30.313 59.417,29.763 60.094,29.086 60.094,28.986 60.517,28.563 Q1.14@61.317,28.563 ; U3.23@51.522,23.991 52.451,23.991 52.662,24.202 52.662,25.263 v2(51.737,26.187)
  Bottom Layer w0.254: v2(51.181,29.21) 51.522,28.869 51.522,26.434 51.737,26.218 v2(51.737,26.187)
SH2_2: J10.2 Q2.10 Q2.14 R40.1 U9.23
SNSOUT: R23.1 U3.10 U8.61 | length 2.3
  Top Layer w0.254: R23.1@44.513,22.352 45.152,22.991 U3.10@46.522,22.991
SNSOUT_2: R46.1 U8.58 U9.10
SO: U3.11 U8.30 | length 4.8
  Top Layer w0.254: 42.672,20.955 44.704,20.955 45.339,21.59 45.339,22.161 45.471,22.161 45.678,22.368 U3.11@45.922,22.368 ; U3.11@45.922,22.468 46.499,22.468 U3.11@46.522,22.491
SO_2: U8.31 U9.11
SP: Q1.5 Q1.6 Q1.7 Q1.8 R17.2 R18.2 R19.2 U3.21 | length 22.2
  Top Layer w0.254: U3.21@51.522,22.991 51.545,23.014 52.637,23.014 v2(52.662,23.039) ; Q1.8@61.017,30.313 61.09,30.386 61.09,31.245 R18.2@62.103,32.258
  Bottom Layer w0.254: v2(52.662,23.039) 52.715,23.039 52.813,23.137 52.87,23.137 53.019,23.286 53.019,29.524 54.483,30.988 58.955,30.988 59.309,30.634 59.309,29.083 59.817,28.575 R19.2@62.484,28.575
  other v1: 63.627,23.749 65.025,24.098 64.008,25.273 62.865,25.412 62.611,31.242 63.5,31.242 65.024,31.75 64.072,32.258
SP_2: Q2.5 Q2.6 Q2.8 R41.2 R42.2 U9.21
TD_N: D2.K J3.2 U2.6 | length 12
  Top Layer w0.132: U2.6@10.807,50.66 10.807,50.835 10.686,50.956 10.686,51.85 12.66,53.823 12.66,58.346 12.639,58.368 12.639,58.74 12.66,58.761 12.66,60.031 J3.2@12.7,60.071
  Bottom Layer w0.114: D2.K@11.43,60.201 11.43,60.164 11.523,60.071 12.446,60.071 12.7,59.817 J3.2@12.7,60.071
TD_P: D1.K J3.1 U2.7 | length 9.8
  Top Layer w0.132: U2.7@10.307,50.66 10.307,50.835 10.428,50.956 10.428,51.957 12.401,53.93 12.401,58.239 12.324,58.316 12.215,58.316 J3.1@11.43,57.531
TX_CLK: U2.22 U8.18 | length 8.2
  Top Layer w0.203: U2.22@12.307,45.86 12.307,44.52 12.504,44.323 12.504,43.376 14.609,41.271 17.281,41.271
TX_D0: U2.24 U8.51 | length 6.6
  Top Layer w0.203: U2.24@13.307,45.86 13.307,44.173 15.603,41.877 17.273,41.877
TX_D1: U2.25 U8.52 | length 6.8
  Top Layer w0.203: U2.25@13.957,46.51 14.132,46.51 14.224,46.418 14.224,43.767 15.811,42.18 17.399,42.18
TX_D2: U2.26 U8.17 | length 7.2
  Top Layer w0.203: U2.26@13.957,47.01 14.486,47.01 14.646,46.85 14.646,43.774 15.936,42.484 17.524,42.484
TX_D3: U2.27 U8.1 | length 7.3
  Top Layer w0.203: U2.27@13.957,47.51 14.583,47.51 14.95,47.144 14.95,43.899 16.062,42.787 17.385,42.787
TX_EN: U2.23 U8.48 | length 7.3
  Top Layer w0.203: U2.23@12.807,45.86 12.807,44.244 15.478,41.574 17.407,41.574
USBD_N: J1.2 U1.32 | length 8.2
  Top Layer w0.166: J1.2@38.011,61.468 37.854,61.468 37.854,60.311 37.757,60.214 37.757,54.879 37.945,54.691 37.945,54.505 38.042,54.408 38.045,54.408 38.112,54.341 U1.32@38.112,53.641
USBD_P: J1.3 R3.1 U1.33 | length 8.7
  Top Layer w0.166: R3.1@36.891,58.801 R3.1@37.465,58.801 ; J1.3@37.211,61.468 37.368,61.468 37.368,60.311 37.465,60.214 37.465,57.658 37.465,54.757 37.611,54.611 37.611,53.642 U1.33@37.612,53.641
pads on no net: J1.1 J1.4 J3. J3.3 J3.4 J3.7 J3.8 J5.1 J5.4 J7. J7.4 J12. MH1.1 MH2.1 MH3.1 MH4.1 U1.2 U1.3 U1.4 U1.10 U1.11 U1.12 U1.13 U1.14 U1.15 U1.16 U1.17 U1.19 U1.21 U1.22 U1.28 U1.29 U1.30 U1.31 U1.41 U1.42 U1.43 U1.45 U1.46 U2.30 U2.31 U4.7 U4.8 U4.9 U4.10 U4.11 U4.12 U4.13 U4.15 U5.6 U5.7 U5.8 U5.9 U6.20 U6.21 U6.23 U6.24 U6.25 U6.26 U6.29 U6.30 U6.36 U8.2 U8.3 U8.4 U8.5 U8.7 U8.8 U8.9 U8.15 U8.38 U8.39 U8.40 U8.41 U8.42 U8.43 U8.44 U8.46 U8.67 U8.77 U8.81 U8.82 U8.83 U8.84 U8.85 U8.86 U8.87 U8.88 U8.91 U8.95 U8.96 U8.97 U8.98

## Polygon pours and split planes (outlines as drawn)
+3V3 on Bottom Layer "+3V3_L04_P027" (solid, pour order 27): 11.557,29.972 11.557,31.514 10.94,32.131 10.287,32.131 10.287,33.528 13.97,33.528 13.97,32.258 13.843,32.131 12.446,32.131 11.938,31.623 11.938,29.972
SP on Bottom Layer "SP_L04_P025" (solid, remove dead copper, pour order 25): 62.103,31.75 62.103,22.733 65.278,22.733 65.532,22.987 65.532,31.75
GND on Bottom Layer "GND_L04_P019" (solid, pour order 19): 55.88,45.085 50.8,45.085 50.8,39.497 50.99,39.306 52.705,39.306 52.959,39.56 52.959,43.307 53.086,43.434 55.88,43.434
+12V on Bottom Layer "+12V_L04_P017" (solid, pour order 17): 61.595,45.212 67.056,45.212 67.31,44.958 67.31,41.783 67.183,41.656 61.595,41.656
GND on Bottom Layer "GND_L04_P014" (solid, pour order 14): 56.134,57.023 51.181,57.023 51.181,53.34 56.134,53.34
+12V on Bottom Layer "+12V_L04_P012" (solid, pour order 12): 61.341,60.071 61.341,55.245 61.595,54.991 66.04,54.991 66.04,60.071
+3V3 on Bottom Layer "+3V3_L04_P005" (solid, pour order 5): 37.338,47.498 40.64,47.498 40.64,42.164 40.513,42.291 37.338,42.291
GND on Bottom Layer "GND_L04_P009" (solid, remove dead copper, pour order 9): 29.845,47.371 29.972,47.498 32.258,47.498 32.766,46.99 32.766,41.783 29.845,41.783
+3V3 on Bottom Layer "+3V3_L04_P008" (solid, remove dead copper, pour order 8): 32.004,55.753 35.687,55.753 36.195,55.245 36.195,52.71 36.19,52.705 32.004,52.705
GND on Bottom Layer "GND_L04_P004" (solid, pour order 4): 18.034,42.545 4.572,42.545 4.572,37.973 18.034,37.973
GND on Bottom Layer "GND_L04_P003" (solid, pour order 3): 15.315,53.848 19.431,53.848 19.431,45.085 15.24,45.085
+3V3 on Bottom Layer "+3V3_L04_P002" (solid, remove dead copper, pour order 2): 17.275,44.196 10.541,44.196 10.541,46.736 7.239,46.736 4.826,44.323 4.826,42.545 17.269,42.545
NetC11_2 on Bottom Layer "NETC11_2_L04_P001" (solid, remove dead copper, pour order 1): 16.002,53.848 14.351,53.848 13.335,52.832 13.335,51.435 14.605,51.435 14.605,53.086 16.008,53.086
+3V3 on Top Layer "+3V3_L01_P028" (solid, pour order 28): 11.557,29.972 11.557,31.514 10.94,32.131 10.287,32.131 10.287,33.528 13.97,33.528 13.97,32.258 13.843,32.131 12.446,32.131 11.938,31.623 11.938,29.972
GND on Top Layer "GND_L01_P026" (solid, remove dead copper, pour order 26): 10.429,35.477 12.379,35.5 12.379,33.782 10.429,33.782
SP on Top Layer "SP_L01_P024" (solid, remove dead copper, pour order 24): 60.706,26.187 60.745,26.226 63.881,26.226 65.659,24.447 65.659,23.749 64.77,22.86 61.817,22.86 61.817,24.638 60.706,24.638
SP on Top Layer "SP_L01_P023" (solid, remove dead copper, pour order 23): 60.706,30.988 62.484,32.766 65.659,32.766 65.659,29.21 61.017,29.21 60.986,29.179 60.706,29.179
+12V on Top Layer "+12V_L01_P022" (solid, remove dead copper, pour order 22): 58.42,30.988 58.42,29.21 58.358,29.148 56.961,29.148 53.594,25.781 53.594,24.257 56.261,24.257 56.261,26.54 58.067,26.54 58.42,26.187 58.42,24.638 58.801,24.638 58.801,30.988
SH1 on Top Layer "SH1_L01_P021" (solid, remove dead copper, pour order 21): 60.094,27.559 67.691,27.559 68.072,27.178 68.072,25.273 65.659,25.273 64.392,26.54 60.094,26.54
SH2 on Top Layer "SH2_L01_P020" (solid, remove dead copper, pour order 20): 60.094,29.086 60.218,29.21 62.611,29.21 64.389,30.988 67.691,30.988 68.072,30.607 68.072,28.448 67.691,28.067 60.071,28.067
+3V3 on Top Layer "+3V3_L01_P018" (solid, remove dead copper, pour order 18): 53.34,45.085 55.499,45.085 55.499,39.497 55.88,39.116 61.214,39.116 61.214,38.989 61.976,38.989 63.246,37.719 64.135,37.719 64.262,37.592 64.262,33.274 60.579,33.274 60.579,36.639 62.23,36.639 62.23,37.465 53.34,37.465
+12V on Top Layer "+12V_L01_P016" (solid, pour order 16): 61.595,45.212 67.056,45.212 67.31,44.958 67.31,41.783 67.183,41.656 61.595,41.656
NetC84_2 on Top Layer "NETC84_2_L01_P015" (solid, pour order 15): 64.135,49.657 64.008,49.784 52.451,49.784 51.435,48.768 51.435,42.672 52.705,42.672 52.705,47.879 64.135,47.879
GND on Top Layer "GND_L01_P013" (solid, pour order 13): 56.134,57.023 51.181,57.023 51.181,53.34 56.134,53.34
+12V on Top Layer "+12V_L01_P011" (solid, pour order 11): 61.341,60.071 61.341,55.245 61.595,54.991 66.04,54.991 66.04,60.071
GND on Top Layer "GND_L01_P010" (solid, remove dead copper, pour order 10): 29.845,47.371 29.972,47.498 32.258,47.498 32.766,46.99 32.766,41.783 29.845,41.783
+3V3 on Top Layer "+3V3_L01_P007" (solid, remove dead copper, pour order 7): 32.004,55.753 35.687,55.753 36.195,55.245 36.195,52.71 36.19,52.705 32.004,52.705
+3V3 on Top Layer "+3V3_L01_P006" (solid, remove dead copper, pour order 6): 40.259,44.323 40.259,47.153 40.041,47.371 37.338,47.371 37.338,46.228 37.465,46.101 39.751,46.101 39.878,45.974 39.878,44.323
NetC11_2 on Top Layer "NETC11_2_L01_P000" (solid, remove dead copper, pour order 0): 12.065,50.292 12.065,51.689 13.589,53.213 13.614,53.213 14.224,53.823 16.015,53.823 16.015,53.213 14.605,53.213 14.605,51.687 12.754,51.687 12.66,51.592 12.66,50.292
+12V on VCC (split plane): 69.594,70.483 69.594,0.51 48.389,0.51 48.389,31.718 48.546,31.875 64.897,31.875 64.972,31.883 65.044,31.904 65.11,31.94 65.168,31.987 65.215,32.045 65.251,32.111 65.272,32.183 65.28,32.258 65.28,39.878 65.272,39.953 65.251,40.025 65.215,40.091 65.168,40.149 65.11,40.196 65.044,40.232 64.972,40.253 64.897,40.261 60.454,40.261 60.454,56.896 60.446,56.971 60.425,57.043 60.389,57.109 60.342,57.167 58.564,58.945 58.506,58.992 58.44,59.028 58.368,59.049 58.293,59.057 54.261,59.057 49.024,64.294 49.024,70.483
+3V3 on VCC (split plane): 162 vertices, not listed, extent 0.51,0.51 64.514,70.483
GND on GND (split plane): 69.594,70.483 69.594,0.51 0.51,0.51 0.51,6.92 13.462,6.92 13.512,6.926 13.539,6.938 13.558,6.946 13.598,6.976 16.138,9.516 16.168,9.556 16.176,9.575 16.188,9.602 16.194,9.652 16.194,12.889 18.034,12.889 18.084,12.895 18.13,12.915 18.17,12.945 18.2,12.985 18.22,13.031 18.226,13.081 18.226,26.924 18.22,26.974 18.2,27.02 18.17,27.06 18.043,27.187 18.003,27.217 17.984,27.225 17.957,27.237 17.907,27.243 12.192,27.243 12.142,27.237 12.096,27.217 12.056,27.187 12.026,27.147 12.006,27.101 12,27.051 12.006,27.001 12.026,26.955 12.056,26.915 12.096,26.885 12.142,26.865 12.192,26.859 17.827,26.859 17.842,26.844 17.842,13.273 16.002,13.273 15.952,13.267 15.906,13.247 15.866,13.217 15.836,13.177 15.816,13.131 15.81,13.081 15.81,9.732 13.382,7.304 0.51,7.304 0.51,28.891 9.168,28.891 9.175,28.886 9.221,28.866 9.271,28.86 9.321,28.866 9.367,28.886 9.407,28.916 9.437,28.956 9.457,29.002 9.463,29.052 9.463,29.083 9.457,29.133 9.437,29.179 9.407,29.219 9.367,29.249 9.321,29.269 9.271,29.275 0.51,29.275 0.51,37.781 17.827,37.781 17.842,37.766 17.842,30.052 16.938,29.148 14.732,29.148 14.682,29.142 14.636,29.122 14.596,29.092 14.566,29.052 14.546,29.006 14.54,28.956 14.546,28.906 14.566,28.86 14.596,28.82 14.636,28.79 14.682,28.77 14.732,28.764 17.018,28.764 17.068,28.77 17.095,28.782 17.114,28.79 17.154,28.82 18.17,29.836 18.2,29.876 18.22,29.922 18.226,29.972 18.226,37.846 18.22,37.896 18.2,37.942 18.17,37.982 18.043,38.109 18.003,38.139 17.984,38.147 17.957,38.159 17.907,38.165 0.51,38.165 0.51,70.483

## Keep-outs
Keep-Out Layer:
  the board outline again, w0.127

## Other copper
Top Layer:
  rectangle net GND: 40.259,60.198 44.831,62.865
  rectangle net GND: 40.259,65.659 44.831,68.58
  rectangle net GND: 29.591,60.198 33.909,62.865
  rectangle net GND: 31.242,65.405 35.611,68.58
  rectangle net GND: 28.575,52.832 31.088,54.864
Bottom Layer:
  region net GND: 44.831,62.865 40.259,62.865 40.259,60.198 44.831,60.198
  region net GND: 44.831,68.58 40.259,68.58 40.259,65.659 44.831,65.659
  rectangle net GND: 29.591,60.198 33.909,62.865
  rectangle net GND: 31.242,65.405 35.611,68.58
  rectangle net GND: 28.575,52.832 31.088,54.864
GND (plane layer: these items are gaps in the copper):
  lines w0.381: 0,6.985 0,7.112 6.477,7.112 12.192,7.112 13.462,7.112 16.002,9.652 16.002,13.081 18.034,13.081 18.034,26.924 17.907,27.051 12.192,27.051 ; 0,29.083 9.271,29.083 9.271,29.052 ; 0,37.973 17.907,37.973 18.034,37.846 18.034,29.972 17.018,28.956 14.732,28.956
VCC (plane layer: these items are gaps in the copper):
  lines w0.254: 0,53.975 0,53.848 0.127,53.975
  lines w0.381: 0,7.112 13.462,7.112 16.002,9.652 15.875,9.779 15.875,13.081 18.034,13.081 18.034,26.924 17.907,27.051 12.065,27.051 ; 0,37.973 18.034,37.973 18.034,29.845 17.145,28.956 14.732,28.956 ; 0.127,29.083 9.144,29.083 9.144,29.052
  lines w0.762: 48.006,0 48.006,31.877 48.387,32.258 55.753,32.258 64.897,32.258 64.897,39.878 60.071,39.878 60.071,56.896 58.293,58.674 54.102,58.674 48.641,64.135 48.641,70.993

## Silkscreen, mask and mechanical layers (free items; w line width, h text height)
Top Overlay:
  lines w0.254: 0,38 14,38 18,38 18,24 18,13 13.614,13 13.614,0

## Text inside footprints (layer, text, board x,y; h text height)
D5: Top Overlay "A" at 60.867,42.224 h0.89 r90; Top Overlay "K" at 60.992,49.349 h0.89 r90
D6: Top Overlay "K" at 61.107,36.924 h0.89; Top Overlay "A" at 56.794,36.991 h0.89
D7: Top Overlay "A" at 62.069,9.846 h0.89 r270; Top Overlay "K" at 61.944,2.721 h0.89 r270
DS1: Top Overlay "K" at 20.124,45.335 h0.56 r180; Top Overlay "A" at 15.412,45.26 h0.51 r180
DS2: Top Overlay "K" at 20.124,47.24 h0.56 r180; Top Overlay "A" at 15.412,47.165 h0.51 r180
U4: Bottom Overlay "16" at 35.331,54.966 h0.89; Bottom Overlay "9" at 34.603,44.002 h0.89; Bottom Overlay "8" at 42.497,43.879 h0.89; Bottom Overlay "1" at 42.57,54.839 h0.89
U5: Top Overlay "1" at 13.417,37.828 h0.64 r270; Top Overlay "16" at 13.438,29.739 h0.64 r270; Top Overlay "9" at 8.845,29.573 h0.64 r270; Top Overlay "8" at 8.84,38.045 h0.64 r270